# EAGLE board rail.crossing (EAGLE 6.1)
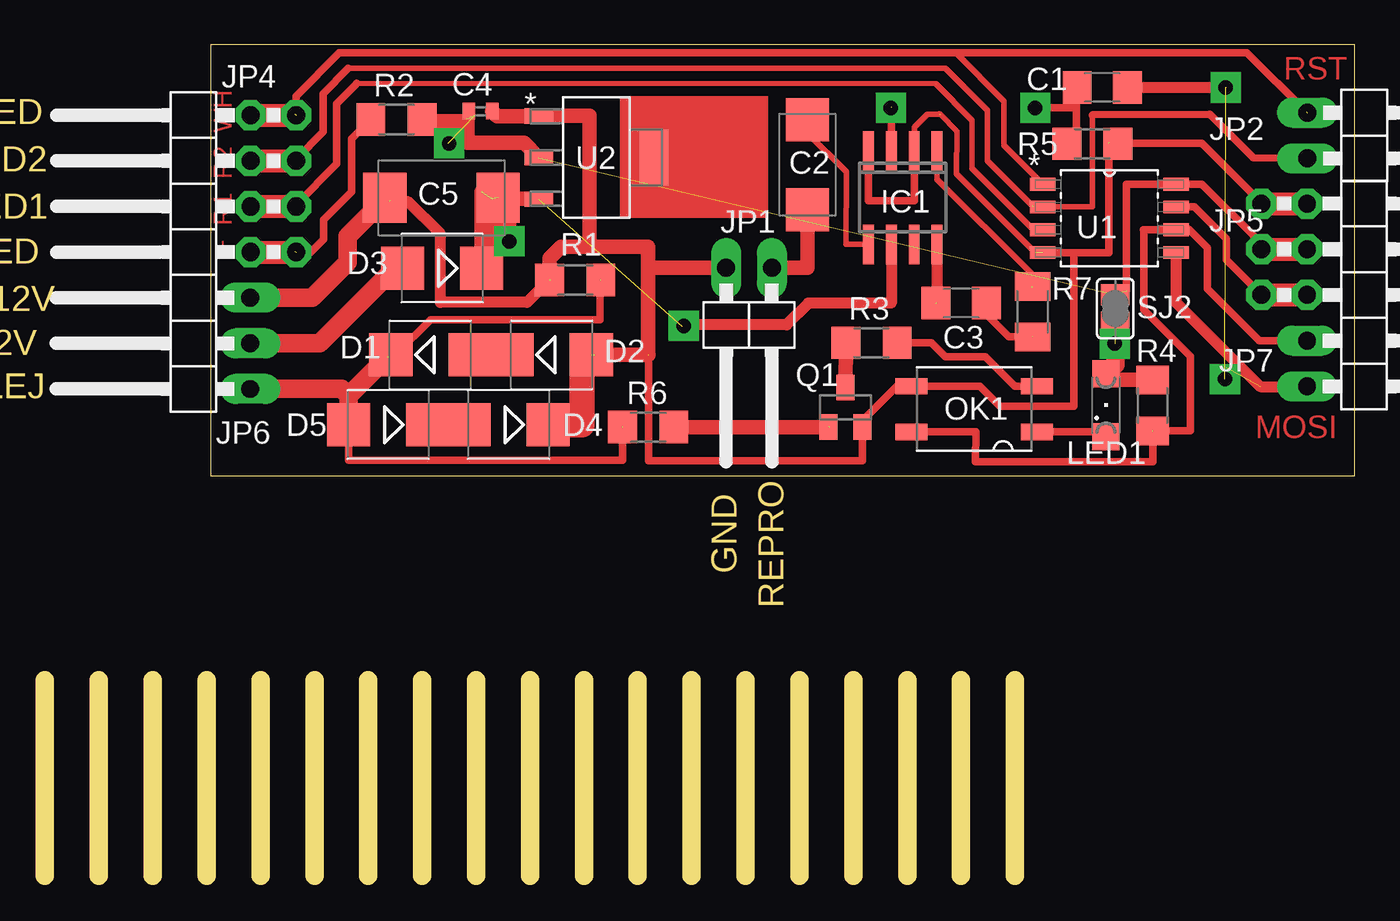
[diagram p0: board, top side]
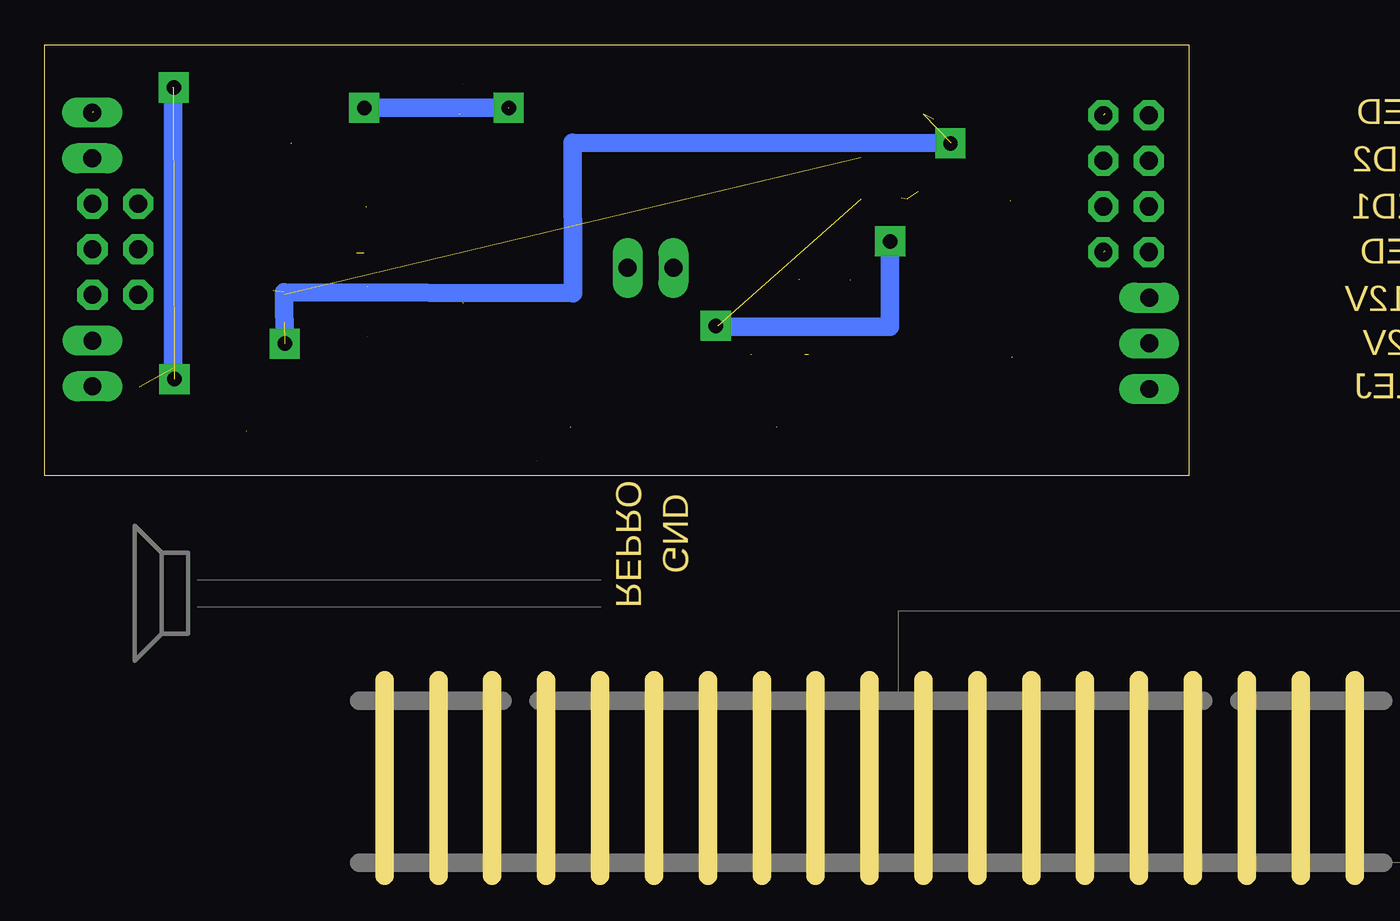
[diagram p1: board, bottom side, seen from below]

Size 72.9 x 46.23 mm. Coordinates in mm from the lower left corner, seen from the top.
Outline: 0,10.88 0,0
Outline: 3,10.88 3,0
Outline: 6,10.88 6,0
Outline: 9,10.88 9,0
Outline: 12,10.88 12,0
Outline: 15,10.88 15,0
Outline: 18,10.88 18,0
Outline: 21,10.88 21,0
Outline: 24,10.88 24,0
Outline: 27,10.88 27,0
Outline: 30,10.88 30,0
Outline: 33,10.88 33,0
Outline: 36,10.88 36,0
Outline: 39,10.88 39,0
Outline: 42,10.88 42,0
Outline: 45,10.88 45,0
Outline: 48,10.88 48,0
Outline: 51,10.88 51,0
Outline: 54,10.88 54,0
Outline: 9.22,22.27 72.9,22.27 72.9,46.23 9.22,46.23 9.22,22.27
Copper layers (1*16): Top 0.035mm / dielectric 1.5mm / Bottom 0.035mm
Design rules: minimum track width 10mil, minimum drill 24mil, track to track 8mil, track to pad 8mil, pad to pad 8mil, via to via 8mil, smd to smd 8mil, copper to edge 40mil, drill to drill 8mil, minimum pad ring 10mil, minimum via ring 8mil, stop-mask expansion 4mil, vias tented up to drill 0mil, thermal gap 10mil

## Footprints (pad centres in the part's own frame; a part is rotated, then mirrored left to right if it is on the bottom)
C1206 = smd 1.6 x 1.8: 1 -1.4,0; 2 1.4,0
SMC_C = smd 2.4 x 2.4: + -2.5,0; - 2.5,0
C0402 = smd 0.7 x 0.9: 1 -0.65,0; 2 0.65,0
SMC_D = smd 2.4 x 2.8: + -3.15,0; - 3.15,0
SMB = smd 2.4 x 2.4: A 2.2,0; C -2.2,0
SO08 = smd 0.6 x 2.2: 1 -1.905,-2.6; 2 -0.635,-2.6; 3 0.635,-2.6; 4 1.905,-2.6; 5 1.905,2.6; 6 0.635,2.6; 7 -0.635,2.6; 8 -1.905,2.6
1X02/90 = drill 1 pad 1.676 long: 1 -1.27,-3.81; 2 1.27,-3.81
2X04/90 = drill 1.016 pad 1.676 octagon: 1 -3.81,-6.35; 2 -3.81,-3.81; 3 -1.27,-6.35; 4 -1.27,-3.81; 5 1.27,-6.35; 6 1.27,-3.81; 7 3.81,-6.35; 8 3.81,-3.81
2X03/90 = drill 1 pad 1.676 octagon: 1 -2.54,-6.35; 2 -2.54,-3.81; 3 0,-6.35; 4 0,-3.81; 5 2.54,-6.35; 6 2.54,-3.81
1X03/90 = drill 1 pad 1.676 long: 1 -2.54,-3.81; 2 0,-3.81; 3 2.54,-3.81
SML1206 = smd 1.5 x 1.5: A 1.75,0; C -1.75,0
SMD4 = smd 0.914 x 1.778: 1 -1.27,-3.5; 2 1.27,-3.5; 3 1.27,3.5; 4 -1.27,3.5
SOT23 = smd 1 x 1.4: 1 -0.95,-1.1; 2 0.95,-1.1; 3 0,1.1
R1206 = smd 1.6 x 1.803: 1 -1.422,0; 2 1.422,0
M1206 = smd 1.6 x 2: 1 -1.4,0; 2 1.4,0
SJ = smd 1.168 x 1.6: 1 -0.762,0; 2 0.762,0
SOIC127P798X216-8N = smd 1.422 x 0.711: 1 -3.708,1.905; 2 -3.708,0.635; 3 -3.708,-0.635; 4 -3.708,-1.905; 5 3.708,-1.905; 6 3.708,-0.635; 7 3.708,0.635; 8 3.708,1.905
SOT230P696X180-4N = smd 1.6 x 0.838: 1 -3.2,2.311; 2 -3.2,0; 3 -3.2,-2.311 | smd 1.6 x 3.099: 4 3.2,0

## Placement (x,y rotation side)
C1  100nF  [C1206]  58.85,43.86 180 top
C2  100uF  [SMC_C]  42.45,39.56 270 top
C3  10uF  [C1206]  51,31.86 180 top
C4  1uF  [C0402]  24.25,42.55 0 top
C5  [SMC_D]  22.08,37.73 180 top
D1  M1  [SMB]  22.11,33.81 180 top
D2  M1  [SMB]  28.21,28.98 0 top
D3  M1  [SMB]  21.46,28.98 0 top
D4  M1  [SMB]  25.81,25.1 180 top
D5  M1  [SMB]  19.11,25.1 180 top
IC1  LM386M-1  [SO08]  47.75,37.73 180 top
JP1  [1X02/90]  39.19,30.01 180 top
JP2  [1X02/90]  74.07,41.19 270 top
JP4  [2X04/90]  7.64,38.51 90 top
JP5  [2X03/90]  74.06,34.86 270 top
JP6  [1X03/90]  7.62,29.62 90 top
JP7  [1X02/90]  74.06,28.5 270 top
LED1  KPT-3216SRD-PRV  [SML1206]  59.06,26.19 90 top
OK1  PC357N14  [SMD4]  51.72,25.97 90 top
Q1  BC847SMD  [SOT23]  44.57,26.07 0 top
R1  2k2  [R1206]  29.51,33.16 180 top
R2  220  [R1206]  19.57,42.09 0 top
R3  220  [R1206]  46.01,29.66 0 top
R4  10K  [R1206]  61.66,26.16 90 top
R5  10K  [R1206]  58.3,40.73 0 top
R6  1K  [R1206]  33.58,24.96 0 top
R7  1K  [M1206]  54.98,31.38 90 top
SJ2  [SJ]  59.57,31.56 270 top
U1  ATTINY85V-10SU  [SOIC127P798X216-8N]  59.26,36.58 0 top
U2  LM1117MP-5.0  [SOT230P696X180-4N]  30.69,39.96 0 top

## Library data of the parts
C1-C5 R1-R7 = rcl
D1-D5 = diode
IC1 = linear
JP1 JP2 JP4-JP7 = pinhead
LED1 = led
OK1 = optocoupler; OC_FARNELL: unknown; OC_NEWARK: unknown
Q1 = transistor-npn
SJ2 = jumper
U1 = Attiny85; MPN: ATTINY85V-10SU; OC_FARNELL: 1455166; OC_NEWARK: 58M3799; PACKAGE: SOIC-8; SUPPLIER: Atmel
U2 = LM1117; MPN: LM1117MP-5.0; OC_FARNELL: 9778209; OC_NEWARK: 41K3471; PACKAGE: SOT223-3; SUPPLIER: NationalSemiconductor

## Nets
220: LED1.C OK1.1
JP1: D3.C D5.A JP6.1 R1.1 R6.1
JP2: C4.2 D2.A D4.C IC1.2 IC1.4 JP1.2 JP5.1 JP5.2 JP6.3 OK1.3 Q1.2 R1.2 R5.2 U1.4 U2.1
N$1: C2.- JP1.1
N$2: C3.1 R7.1
N$3: C3.2 IC1.8
N$4: D2.C D3.A
N$5: D4.A D5.C
N$6: Q1.1 R6.2
N$7: Q1.3 R3.1
N$8: C2.+ IC1.5
N$9: OK1.2 R3.2
N$10: JP5.5 JP5.6 U1.7
N$11: C1.1 JP7.2 U1.5
N$12: JP4.1 JP4.2 R2.1
N$14: JP7.1 OK1.4 R4.1 U1.6
N$15: JP5.3 JP5.4 LED1.A R2.2 R4.2 SJ2.2 U1.8
N$16: IC1.1 R7.2
N$17: C1.2 IC1.3 R5.1
N$20: C4.1 SJ2.1 U2.2
N$21: D1.A JP6.2
N$22: C5.+ D1.C IC1.6 U2.3
RED1: JP2.2 JP4.5 JP4.6 U1.2
RED2: JP4.3 JP4.4 U1.3
WHITE: JP2.1 JP4.7 JP4.8 U1.1

## Tracks (layer width: path | path; a pad name or v marks a point on that pad's centre or on a via)
220
  Top 0.406: LED1.C 59.02,24.7 OK1.1
JP1  (3 unrouted)
  Top 0.406: 19.48,28.98 21.46,30.94 30.91,30.94 30.91,33.17 | D5.A 16.92,23.12 32.16,23.12 32.16,24.98 32.15,25
  Top 1.016: 16.9,25.11 16.9,26.7 | 16.9,26.7 19.09,28.89 | JP6.1 16.51,27.09 16.9,26.7
  Top 1.27: D5.A 16.9,25.11 | 19.48,28.98 D3.C 19.1,28.83
JP2  (9 unrouted)
  Top 0.305: 49.84,42.38 50.76,41.44 50.75,39.06 55.14,34.68 56.09,34.68 | 19.39,37.76 19.15,37.52 | IC1.2 48.39,41.65 49.11,42.38 49.79,42.38 49.8,42.39
  Top 0.406: 59.18,40.77 64.4,40.77 67.76,37.39 JP5.1 | OK1.3 52.04,27.24 53.15,26.13 57.28,26.13 57.28,34.66 55.16,34.66 55.16,34.65 | IC1.4 45.85,37.56 48.39,37.56 IC1.2 | OK1.3 47.85,27.24 | 20.17,37.52 19.15,37.52 | 33.6,29 33.6,23.1 45.51,23.1 | 45.52,23.11 Q1.2 | Q1.2 45.49,24.98 | Q1.2 45.52,25.3 47.44,27.23 48.21,27.23 OK1.3 | 30.33,35 30.43,34.9 | 55.14,34.68 59.22,34.68 59.22,40.77 59.72,40.77 R5.2
  Top 0.61: 20.17,37.52 22.01,35.71 22.01,31.9 26.84,31.9 R1.2
  Top 0.813: 33.6,29 32.93,28.99 30.61,28.99 | 33.58,33.82 33.58,34.99 28.72,34.99 | 33.58,33.82 33.58,29 | JP1.2 33.58,33.82 | 29.91,29.01 30.41,29.01 D2.A | 28.72,34.99 28.09,34.35 28.09,33.12 | 28.72,34.99 28.74,35 30.33,35 30.33,42.3 27.51,42.3 U2.1 25.18,42.27 C4.2 | 70.24,37.39 JP5.2
  Top 1.016: JP6.3 14.87,32.16 16.84,34.14 16.84,35.59 18.86,37.6 19.2,37.6
  Top 1.27: 67.76,37.39 70.24,37.39
  Top 1.422: D4.C 29.91,25.1 29.91,29.01
N$1
  Top 0.813: 43.22,36.29 C2.- 42.45,33.82 JP1.1
N$2  (1 unrouted)
  Top 0.406: C3.1 52.4,31.25 53.65,30 54.96,30 55,29.96
N$3  (1 unrouted)
  Top 0.61: IC1.8 49.66,31.88
N$4
  Top 0.406: D3.A D2.C
N$5
  Top 0.406: D5.C D4.A
N$6  (1 unrouted)
  Top 0.813: R6.2 43.66,24.96 43.66,25.02
N$7
  Top 0.813: Q1.3 44.57,27.22 R3.1
N$8
  Top 0.305: C2.+ 42.45,41.33 44.61,39.16 44.6,35.13 IC1.5
N$9
  Top 0.406: R3.2 49.36,29.66 50.12,28.89 52.35,28.89 54,27.24 OK1.2
N$10
  Top 0.406: U1.7 63.99,37.22 65.76,35.44 65.76,34.27 JP5.5
  Top 1.27: JP5.5 JP5.6
N$11  (2 unrouted)
  Top 0.406: 71.04,27.21 JP7.2
  Top 0.61: U1.5 62.96,31.91 67.65,27.21 71.04,27.21 | C1.1 65.76,43.86
  Bottom 0.305: 65.76,28.27 65.7,27.71
  Bottom 1.016: 65.75,43.84 65.76,28.27
N$12  (1 unrouted)
  Top 0.406: R2.1 17.06,41 17.06,38.05 15.53,36.51 15.53,35.43 14.76,34.66 14.03,34.66 JP4.1
  Top 1.016: 13.85,34.7 13.91,34.76
  Top 1.27: JP4.2 13.85,34.7
N$13
  Bottom 1.016: 25.87,35.34 25.86,30.55 35.45,30.54
N$14  (1 unrouted)
  Top 0.406: OK1.4 51.82,24.7 51.8,23.04 61.66,23.02 61.66,24.4 R4.1 | R4.1 61.68,24.75 63.76,24.75 63.75,28.91 61.16,31.5 61.16,35.94 61.15,35.95 U1.6 62.99,35.98 63.68,35.98 64.71,34.94 64.71,32.66 67.6,29.77 JP7.1
N$15  (via drill 0.8 pad 1.68)  (5 unrouted)
  Top 0.406: LED1.A 59.55,28.42 59.57,28.42 | 60.19,32.56 60.19,38.48 U1.8 64.4,38.48 67.29,35.6 67.29,35.29 JP5.3
  Top 0.61: R2.2 23.45,42.09 23.61,42.25
  Top 0.813: R4.2 59.41,27.59 LED1.A
  Top 1.016: 59.57,28.42 SJ2.2
  Top 1.27: JP5.3 JP5.4
  Bottom 1.016: 22.44,40.76 43.52,40.79 43.5,32.43 59.59,32.48 v59.55,29.61
N$16  (1 unrouted)
  Top 0.305: IC1.1 49.66,38.77 54.91,33.51 54.91,32.81 54.94,32.79
N$17  (via drill 0.8 pad 1.42, 0.8 pad 1.68)  (1 unrouted)
  Top 0.406: 47.11,42.75 47.11,39.52 IC1.3 | 57.44,40.75 R5.1 57.43,40.75 57.43,42.79 | C1.2 57.43,42.79 | v55.12,42.73 57.36,42.73 57.43,42.79
  Bottom 1.016: v55.12,42.73 v47.09,42.73
N$18  (via drill 0.8 pad 1.68)
  other vias: 22.5,40.75
N$19  (via drill 0.8 pad 1.68)  (1 unrouted)
  other vias: 65.72,43.86 65.69,27.64
N$20  (1 unrouted)
  Top 0.61: C4.1 23.6,40.79 23.5,40.69
  Top 0.813: U2.2 26.66,40.79 23.6,40.79
N$21
  Top 1.016: D1.A 19.47,33.81 15.3,29.64 11.45,29.64 JP6.2
N$22  (3 unrouted)
  Top 0.61: IC1.6 47.12,31.86 42.5,31.86 41.29,30.65 35.51,30.65 35.45,30.59
  Top 0.813: D1.C 24.31,38.05 | U2.3 27.46,37.68 24.9,37.68
N$24  (via drill 0.8 pad 1.68)
  other vias: 25.85,35.3
N$25  (via drill 0.8 pad 1.68)
  other vias: 35.56,30.6
N$27
  Top 0.813: 25.84,35.81 25.84,37.4
RED1  (1 unrouted)
  Top 0.305: 55,37.24 U1.2 58.28,37.22 58.3,37.24 58.3,42.31 | JP4.5 13.99,39.88 | 16.89,44.94 50.12,44.94 52.46,42.6 52.46,39.79 55.02,37.23 55.41,37.23 55.43,37.21
  Top 0.406: 13.99,39.88 15.47,41.39 15.47,43.52 16.89,44.94 | JP2.2 67.27,39.94 64.85,42.36 58.33,42.34 58.3,42.31
  Top 1.27: JP4.6 JP4.5
RED2  (1 unrouted)
  Top 0.305: 17.35,44.1 49.58,44.08 | U1.3 55.01,35.97 51.6,39.38 51.6,42.05 49.59,44.06
  Top 0.406: JP4.3 13.99,37.34 16.25,39.62 16.25,42.96 17.28,43.99 17.35,44.1
  Top 1.27: JP4.4 JP4.3
WHITE  (2 unrouted)
  Top 0.305: 50.61,45.79 50.7,45.79 53.39,43.1 53.39,40.64 U1.1
  Top 0.406: JP4.7 13.99,43.36 16.37,45.79 50.61,45.79 66.91,45.79 70.2,42.5
  Top 1.016: 13.83,42.32 13.91,42.4
  Top 1.27: JP4.8 13.83,42.32
(copper drawn outside any net)
  shapes: Top area x3

## Text on the board
Top: RST | + R1 R2 WH | MOSI
Dimension: BÍLÁ LED | ČERVENÁ LED2 | ČERVENÁ LED1 | +5V SERVO | -5V SERVO | +5V LED | KOLEJIŠTĚ, -12V | SERVO SIGNÁL | +12V | IZOLOVANÁ KOLEJ | GND | REPRO
tDocu: ČERVENÁ | ČERNÁ | SERVO | +12V | BÍLÁ | -12V